# Altium PCB 0PCBSM.PcbDoc
Units mil, origin at the board's own origin, x right, y up, seen from the top; angles counter-clockwise.
Board outline 7580 x 7605 mil, 2 copper layers (Top Layer, Bottom Layer); 95 components, 85 nets, 326 pads, 4 vias.
Unrouted connection lines stored in the file: 25.
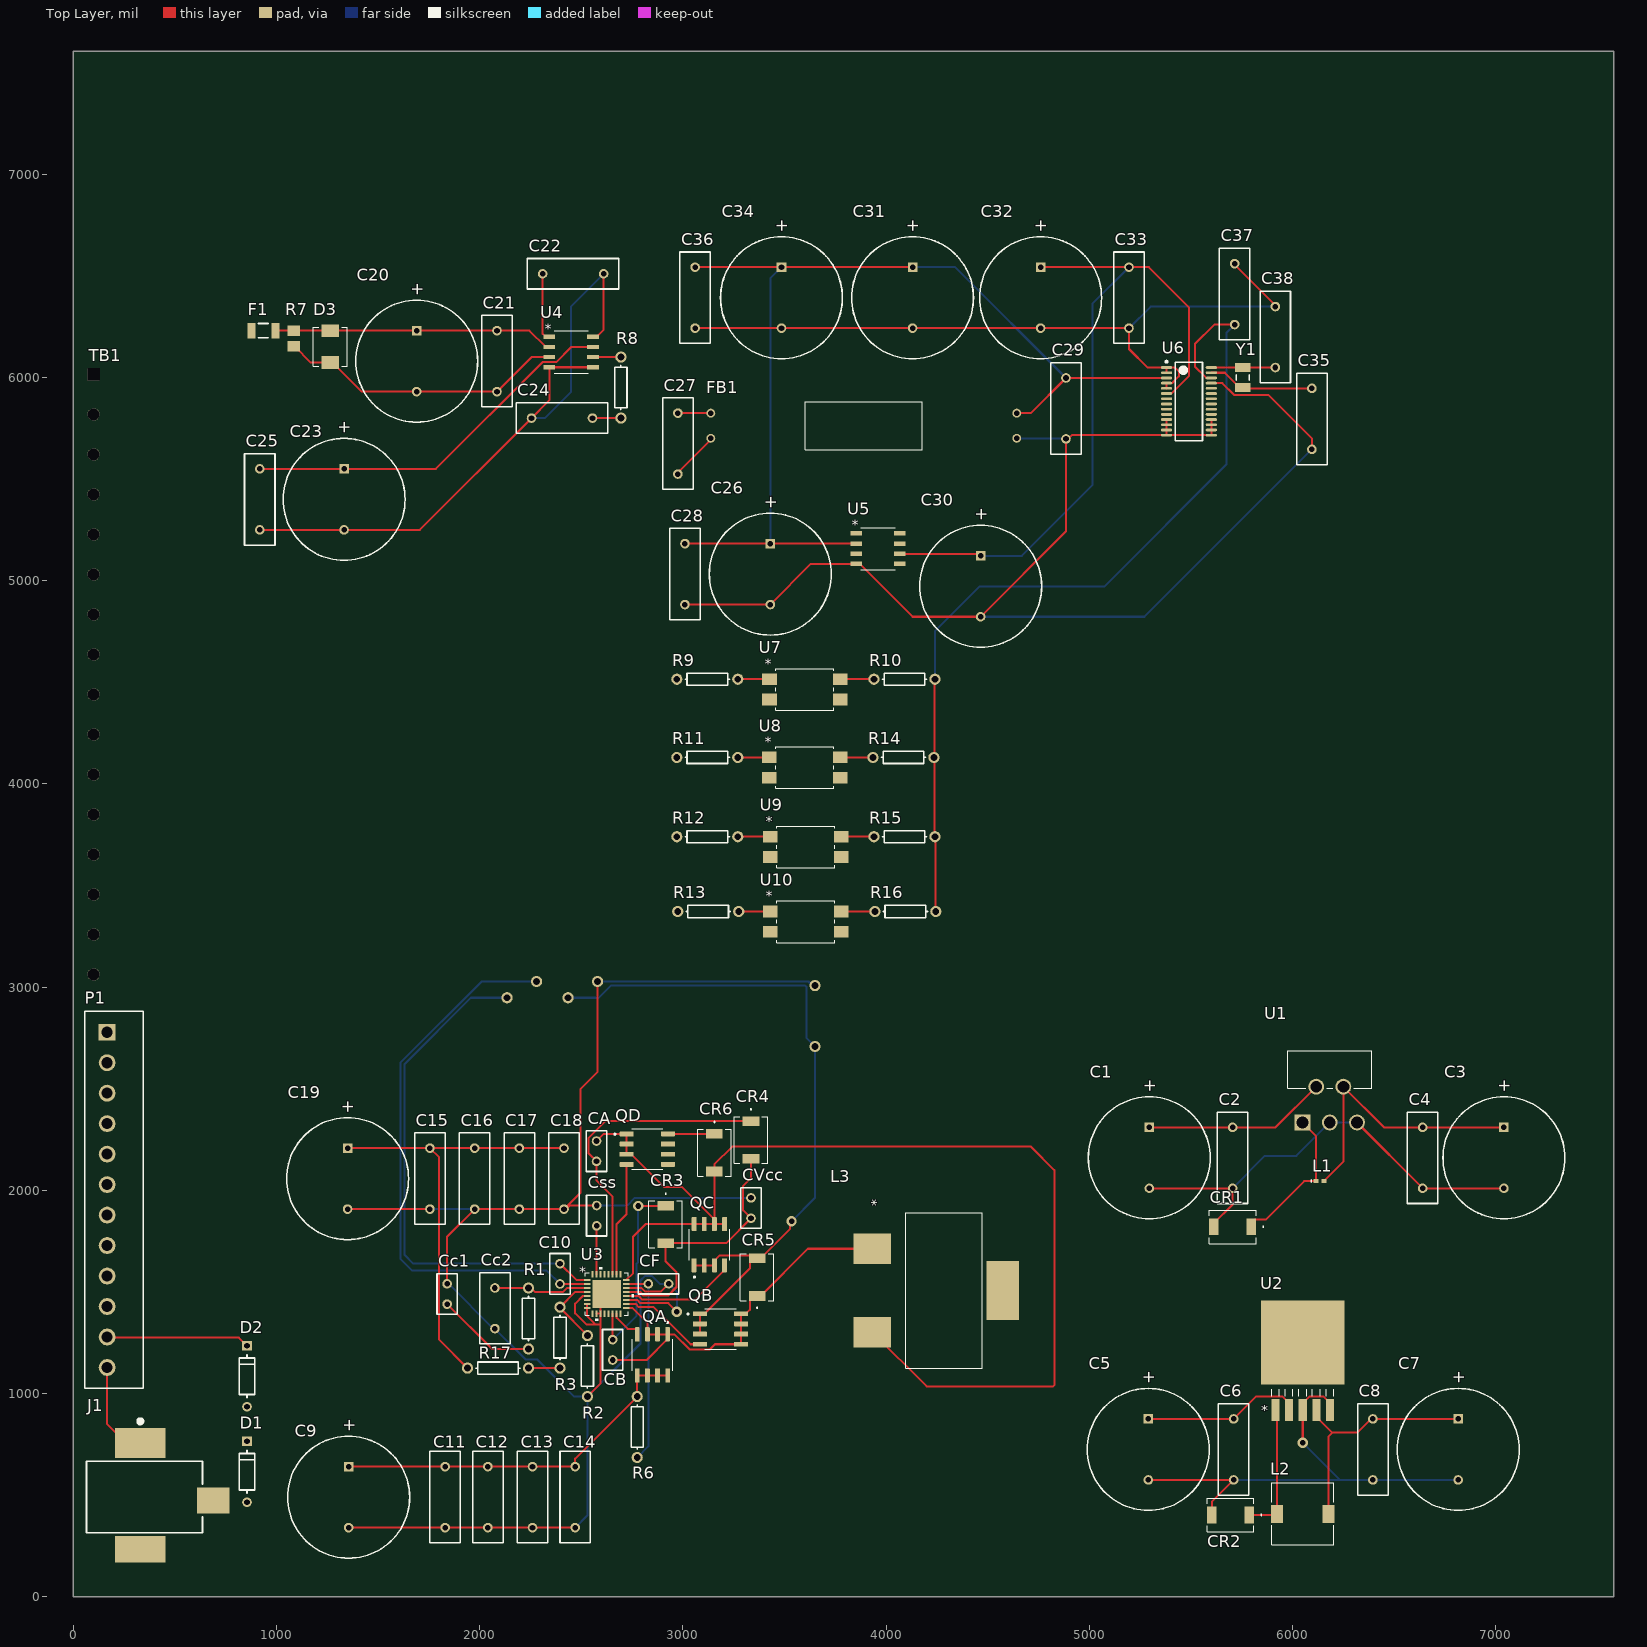
[diagram p0: Top Layer view]
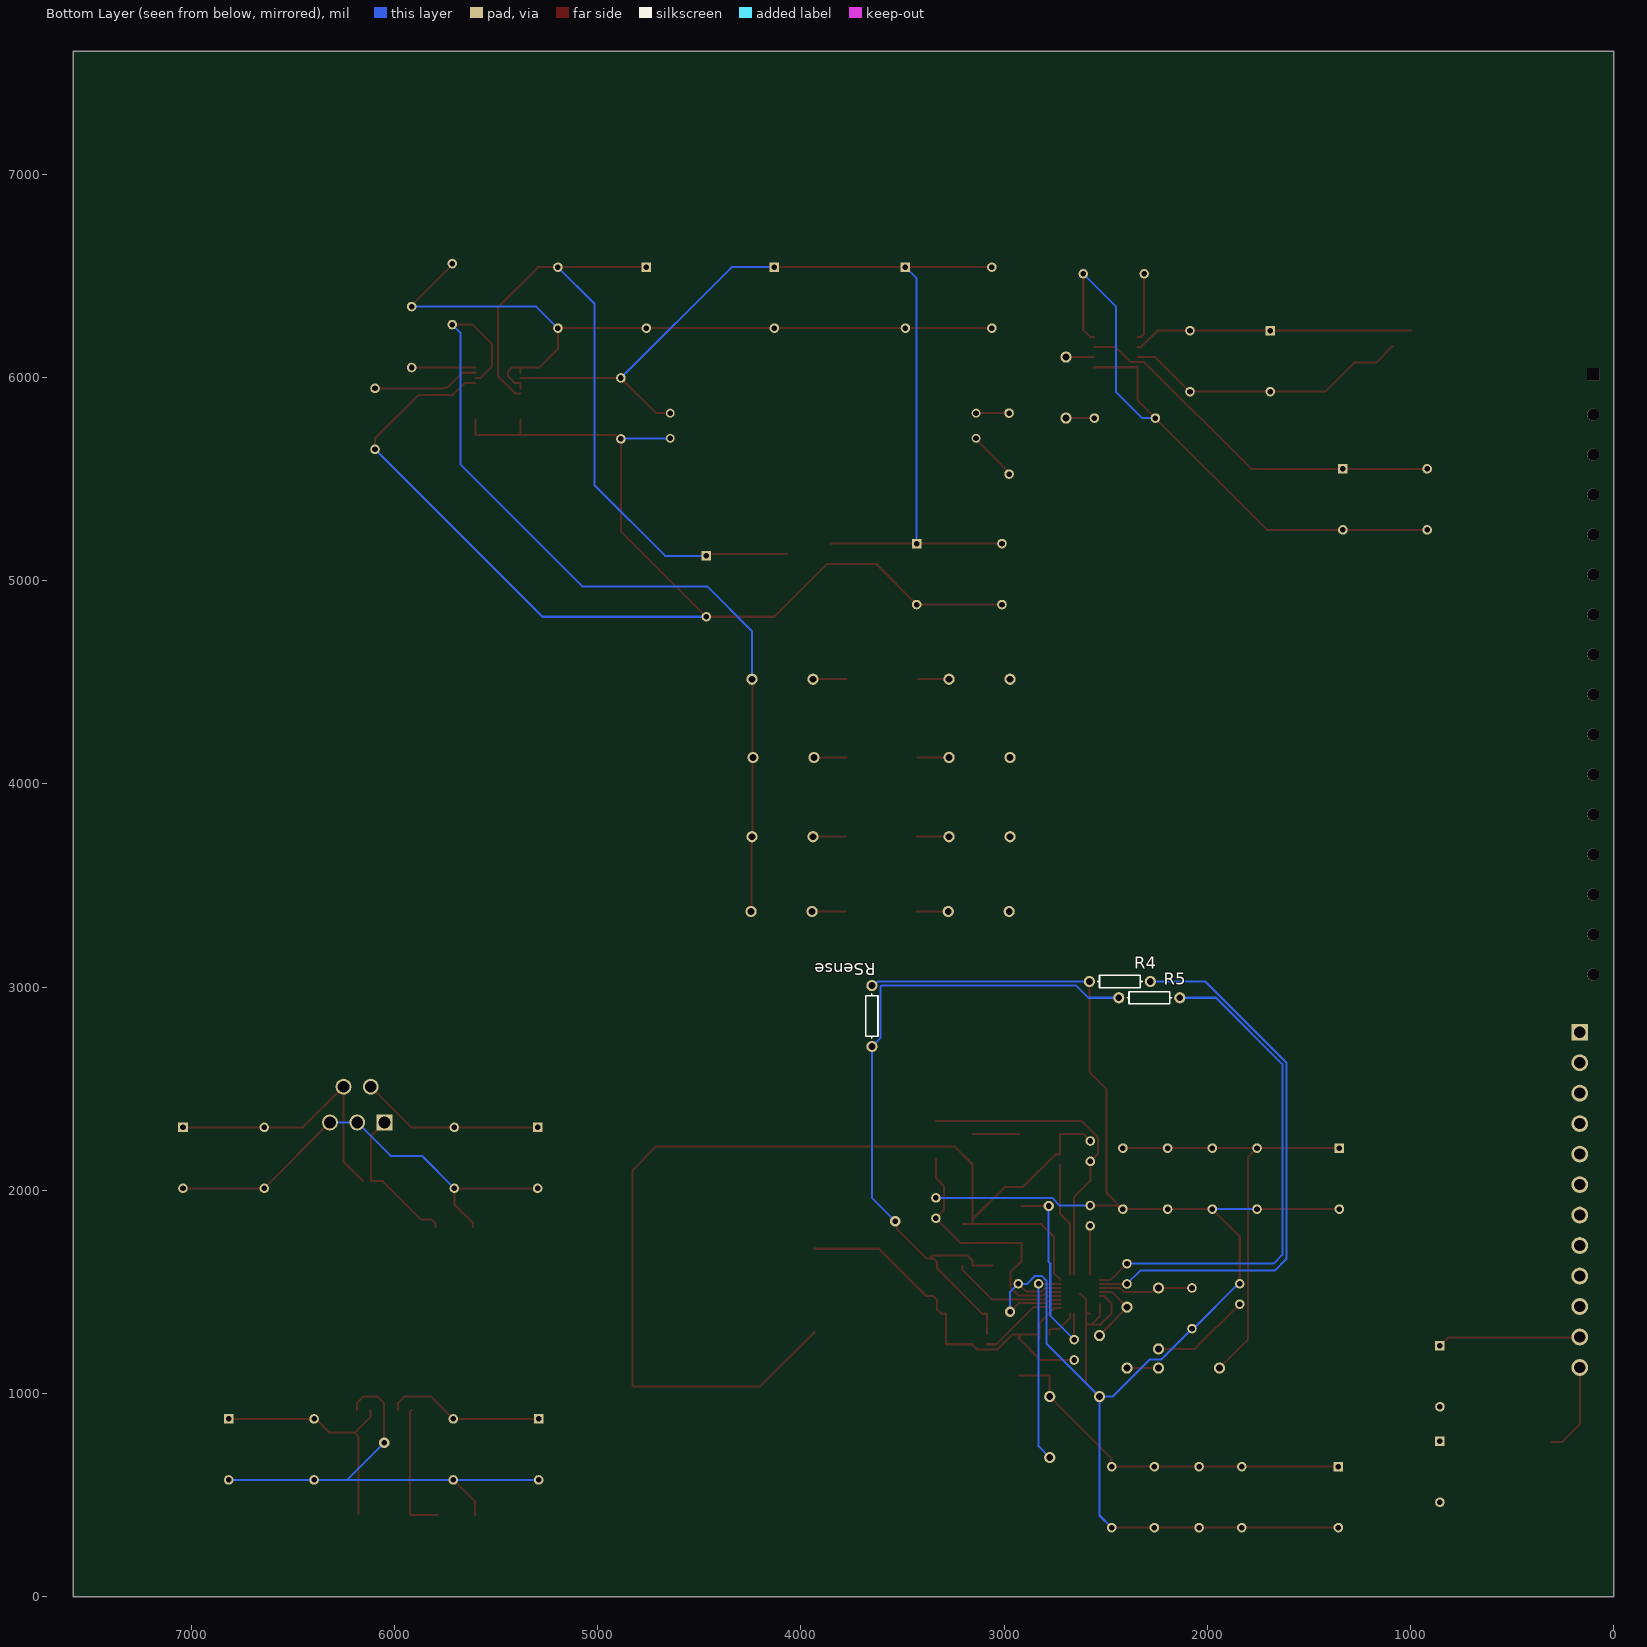
[diagram p1: Bottom Layer view, seen from below]

## Layer stack, top to bottom
Top Solder: solder mask 0.4, Solder Resist, Dk 3.5
Top Layer: signal copper 1.4
Dielectric 1: dielectric 12.6, FR-4, Dk 4.8
Bottom Layer: signal copper 1.4
Bottom Solder: solder mask 0.4, Solder Resist, Dk 3.5

## Board outline
0,0 7580,0 7580,7605 0,7605

## Design rules (kind name [scope] priority, off if disabled: settings)
Clearance [All] p1: gap=9 ignorepadtopadclearanceinfootprint=FALSE except(0: Arc-Hole Track-Hole SMDPad-Hole THPad-Hole Via-Hole Fill-Hole Poly-Hole Region-Hole Text-Hole; 10: Arc-Text Track-Text SMDPad-Text THPad-Text Via-Text Fill-Text Poly-Text Region-Text Text-Text)
Height [All] p1 off: minheight=0 maxheight=1000 prefheight=500
PolygonConnect [All] p1: connectstyle=Relief reliefconductorwidth=10 reliefentries=4 polygonreliefangle="90 Angle" airgapwidth=10
RoomDefinition "Input Subsystem" [InComponentClass('Input Subsystem')] p1: confinementstyle=ConfineIn formatcopy=TRUE lockcomponents=FALSE outline 2880,3185 6355,3185 6355,7196.74 2880,7196.74
RoomDefinition "Industrial Instrumentation Controller" [InComponentClass('Industrial Instrumentation Controller')] p2: confinementstyle=ConfineIn formatcopy=TRUE lockcomponents=FALSE outline 45,119.25 790,119.25 790,6158.15 45,6158.15
RoomDefinition 24VBuckBoostConverterSM [InComponentClass('24VBuckBoostConverterSM')] p3: confinementstyle=ConfineIn formatcopy=TRUE lockcomponents=FALSE outline 1040,170 4905,170 4905,3175 1040,3175
RoomDefinition "Power Subsystem" [InComponentClass('Power Subsystem')] p4: confinementstyle=ConfineIn formatcopy=TRUE lockcomponents=FALSE outline 945,420.12 945,1400.12 800,1400.12 800,420.12
RoomDefinition CurrentSensingSM [InComponentClass('CurrentSensingSM')] p5: confinementstyle=ConfineIn formatcopy=TRUE lockcomponents=FALSE outline 822.75,5050 2815,5050 2815,6710 822.75,6710
RoomDefinition 5VBuckConverterSM [InComponentClass('5VBuckConverterSM')] p6: confinementstyle=ConfineIn formatcopy=TRUE lockcomponents=FALSE outline 4975,1665 7385,1665 7385,2940 4975,2940
RoomDefinition 3.3VBuckConverterSM [InComponentClass('3.3VBuckConverterSM')] p7: confinementstyle=ConfineIn formatcopy=TRUE lockcomponents=FALSE outline 4980,187.5 7170,187.5 7170,1595 4980,1595
RoutingVias [All] p1: holewidth=28 width=50 viastyle="Through Hole" minholewidth=28 minwidth=50 maxholewidth=28 maxwidth=50
SolderMaskExpansion [All] p1: expansion=4 istentingtop=FALSE
Width [All] p1: maxlimit=10 minlimit=10 preferedwidth=10
29 further rules are at their usual default settings.

## Classes and differential pairs
component class "Power Subsystem": D1 D2
component class "Input Subsystem": C26 C27 C28 C29 C30 C31 C32 C33 C34 C35 C36 C37 C38 FB1 R9 R10 R11 R12 R13 R14 R15 R16 U5 U6 U7 U8 U9 U10 Y1
component class "Industrial Instrumentation Controller": J1 P1 TB1
component class CurrentSensingSM: C20 C21 C22 C23 C24 C25 D3 F1 R7 R8 U4
component class 24VBuckBoostConverterSM: C9 C10 C11 C12 C13 C14 C15 C16 C17 C18 C19 CA CB Cc1 Cc2 CF CR3 CR4 CR5 CR6 Css CVcc L3 QA QB QC QD R1 R2 R3 R4 R5 R6 R17 RSense U3
component class 5VBuckConverterSM: C1 C2 C3 C4 CR1 L1 U1
component class 3.3VBuckConverterSM: C5 C6 C7 C8 CR2 L2 U2

## Components (designator, comment, footprint, x,y, rotation, side; value= is the part's Value field where it differs from the comment)
C1 "Cap Pol1" RB7.6-15 5295,2160 r90 top value=47uF
C2 "Cap" RAD-0.3 5705,2160 r90 top value=0.1uF
C3 "Cap Pol1" RB7.6-15 7040,2160 r90 top value=47uF
C4 "Cap" RAD-0.3 6640,2160 r90 top value=0.1uF
C5 "Cap Pol1" RB7.6-15 5290,725 r90 top value=47uF
C6 "Cap" RAD-0.3 5710,725 r90 top value=0.1uF
C7 "Cap Pol1" RB7.6-15 6815,725 r90 top value=47uF
C8 "Cap" RAD-0.3 6395,725 r90 top value=0.1uF
C9 "Cap Pol1" RB7.6-15 1355,490 r90 top value=100uF
C10 "Cap" RAD-0.1 2395,1589.21 r270 top value=68pF
C11 "Cap" RAD-0.3 1830,490 r90 top value=4.7uF
C12 "Cap" RAD-0.3 2040,490 r90 top value=4.7uF
C13 "Cap" RAD-0.3 2260,490 r90 top value=1uF
C14 "Cap" RAD-0.3 2470,490 r90 top value=10uF
C15 "Cap" RAD-0.3 1755,2057.5 r90 top value=22uF
C16 "Cap" RAD-0.3 1975,2057.5 r90 top value=22uF
C17 "Cap" RAD-0.3 2195,2057.5 r90 top value=22uF
C18 "Cap" RAD-0.3 2415,2057.5 r90 top value=0.1uF
C19 "Cap Pol1" RB7.6-15 1350,2057.5 r90 top value=330uF
C20 "Cap Pol1" RB7.6-15 1690,6080 r90 top value=4.7uF
C21 "Cap" RAD-0.3 2085,6080 r90 top value=0.1uF
C22 "Cap" RAD-0.3 2460,6510 r180 top value=1uF
C23 "Cap Pol1" RB7.6-15 1332.75,5400 r90 top value=47uF
C24 "Cap" RAD-0.3 2405,5800 r0 top value=1uF
C25 "Cap" RAD-0.3 917.75,5400 r90 top value=0.1uF
C26 "Cap Pol1" RB7.6-15 3430,5032.24 r90 top value=47uF
C27 "Cap" RAD-0.3 2975,5674.25 r90 top value=0.1uF
C28 "Cap" RAD-0.3 3010,5032.24 r90 top value=0.1uF
C29 "Cap" RAD-0.3 4885,5847.24 r90 top value=0.1uF
C30 "Cap Pol1" RB7.6-15 4465,4972.24 r90 top value=47uF
C31 "Cap Pol1" RB7.6-15 4130,6392.24 r90 top value=20uF
C32 "Cap Pol1" RB7.6-15 4760,6392.24 r90 top value=47uF
C33 "Cap" RAD-0.3 5195,6392.24 r90 top value=0.1uF
C34 "Cap Pol1" RB7.6-15 3485,6392.24 r90 top value=10uF
C35 "Cap" RAD-0.3 6095,5796.22 r90 top value=10pF
C36 "Cap" RAD-0.3 3060,6392.24 r90 top value=0.1uF
C37 "Cap" RAD-0.3 5715,6410 r270 top value=0.1uF
C38 "Cap" RAD-0.3 5915,6198.58 r270 top value=10pF
CA "Cap" RAD-0.1 2575,2192.5 r270 top value=220nF
CB "Cap" RAD-0.1 2654.53,1215 r270 top value=220nF
Cc1 "Cap" RAD-0.1 1840,1490 r270 top value=10nF
Cc2 "Cap" RAD-0.2 2075,1419.53 r90 top value=47pF
CF "Cap" RAD-0.1 2880,1540 r180 top value=0.1uF
CR1 "B340B-13-F" B340A-13-F 5705,1820 r180 top
CR2 "B340B-13-F" B340A-13-F 5695,402.5 r180 top
CR3 "B340B-13-F" B340A-13-F 2915,1832.5 r270 top
CR4 "B340B-13-F" B340A-13-F 3335,2247.5 r270 top
CR5 "B340B-13-F" B340A-13-F 3365,1572.5 r90 top
CR6 "B340B-13-F" B340A-13-F 3155,2185 r270 top
Css "Cap" RAD-0.1 2575.79,1875 r270 top value=220nF
CVcc "Cap" RAD-0.1 3335,1912.5 r270 top value=4.7uF
D1 "1N4148" FP-017AG-MFG 855,615.12 r270 top
D2 "1N4148" FP-017AG-MFG 855,1085.12 r270 top
D3 "Tranzorb" SZ1SMB36CAT3G 1265,6151.5 r90 top
F1 "0ZCJ0005FF2E" FP-0ZCJ0005FF2E-MFG 935,6230 r0 top
FB1 "FB20011-3B-RC" FB20011 3890,5762.24 r0 top
J1 "RASM722X" SWIT-RASM722X_V 510,495 r270 top
L1 "Inductor" 0402-A 6134.68,2045 r0 top value=100uH
L2 "Inductor" B82472P6683M000 6050,407.5 r0 top value=68uH
L3 "SER2013-472MLB" SER2013-472MLB 4285,1507.5 r270 top value=4.7uH
P1 "691701310012B" 691701310012B 200,1953.15 r270 top
QA "TSM120N06LCS_RLG" SOP127P600X200-8N 2850,1190 r270 top
QB "TSM120N06LCS_RLG" SOP127P600X200-8N 3185,1317.5 r0 top
QC "TSM120N06LCS_RLG" SOP127P600X200-8N 3130,1732.5 r90 top
QD "TSM120N06LCS_RLG" SOP127P600X200-8N 2825,2202.5 r0 top
R1 "Res1" AXIAL-0.3 2240,1369.53 r90 top value=100k
R2 "Res1" AXIAL-0.3 2530,1135 r270 top value=1k
R3 "Res1" AXIAL-0.3 2395,1275 r270 top value=28k
R4 "Res1" AXIAL-0.3 2430,3027.5 r180 bottom value=100
R5 "Res1" AXIAL-0.3 2285,2947.5 r180 bottom value=100
R6 "Res1" AXIAL-0.3 2775,835 r270 top value=10
R7 "RG2012N-101-W-T1" RESC2013X50X40ML20T20 1085,6191.61 r90 top value=100
R8 "Res1" AXIAL-0.3 2695,5950 r270 top value=1K
R9 "Res1" AXIAL-0.3 3120,4515 r180 top value=4.7k
R10 "Res1" AXIAL-0.3 4090,4515 r0 top value=4.7k
R11 "Res1" AXIAL-0.3 3120,4130 r180 top value=4.7k
R12 "Res1" AXIAL-0.3 3120,3740 r180 top value=4.7k
R13 "Res1" AXIAL-0.3 3124.5,3371.74 r180 top value=4.7k
R14 "Res1" AXIAL-0.3 4085,4130 r0 top value=4.7k
R15 "Res1" AXIAL-0.3 4090,3740 r0 top value=4.7k
R16 "Res1" AXIAL-0.3 4094.5,3371.74 r0 top value=4.7k
R17 "Res1" AXIAL-0.3 2090,1125 r180 top value=1k
RSense "Res1" AXIAL-0.3 3650,2857.5 r90 bottom value=18m
TB1 "OSTOQ167151" OSTOQ167151 100,6014.8 r0 top
U1 "LM2595T-5.0/NOPB" LM2595ST-5P0 6317,2853 r0 top
U2 "LM2595SX-3.3/NOPB" LM2595SX-3P3 6050,1245 r0 top
U3 "LTC3780EUH#TRPBF" LTC3780EUH 2625,1490 r0 top
U4 "LT1990ACS8#PBF" LT1990ACS8-PBF 2450,6125 r0 top
U5 "ISL21090BFB825Z-TK" ISL21090BFB825Z-TK 3960,5157.24 r0 top
U6 "AD7718BRUZ" AD7718BRUZ 5490,5882.24 r0 top
U7 "PS2501L-1-A" PS2501L-1-A 3600,4465 r0 top
U8 "PS2501L-1-A" PS2501L-1-A 3599.5,4080 r0 top
U9 "PS2501L-1-A" PS2501L-1-A 3604.5,3690 r0 top
U10 "PS2501L-1-A" PS2501L-1-A 3604.5,3321.74 r0 top
Y1 "ABS07-32.768KHZ-T" FP-ABS07-MFG 5755,5999.37 r270 top

## Footprints (in the part's own frame and the unit in brackets; to place one, negate y for a bottom-side part, rotate by r counter-clockwise, add the part's x,y. Pads: shape width x height; smd on the part's side, far side on the other; paste and mask are expansions set on the pad)
0402-A [mm] "Chip Inductor, Body 1.0x0.5mm, IPC High Density"
  rect 0.6x0.5 smd: 1(-0.5,0) 2(0.5,0)
  silkscreen extent -1.1,-0.15 -1.1,0.15, body extent -0.55,-0.3 0.55,0.3, height 0.55
691701310012B [mm] "Vertical PCB Header THR Type, pitch 3.81mm, 12p"
  rect 2.1x2.1 hole 1.4: 1(-20.955,-0.85)
  round 2.1 hole 1.4: 2(-17.145,-0.85) 3(-13.335,-0.85) 4(-9.525,-0.85) 5(-5.715,-0.85) 6(-1.905,-0.85) 7(1.905,-0.85) 8(5.715,-0.85) 9(9.525,-0.85) 10(13.335,-0.85) 11(17.145,-0.85) 12(20.955,-0.85)
  silkscreen extent -23.55,-3.65 23.55,3.65, body extent -23.55,-3.65 23.55,3.65, height 9.25
AD7718BRUZ [mm] "TSOP, 28-Leads, Body 9.7x4.4mm, Pitch 0.65mm, IPC High Density"
  oval 1.4x0.35 smd: 1(-2.8,4.225) 2(-2.8,3.575) 3(-2.8,2.925) 4(-2.8,2.275) 5(-2.8,1.625) 6(-2.8,0.975) 7(-2.8,0.325) 8(-2.8,-0.325) 9(-2.8,-0.975) 10(-2.8,-1.625) 11(-2.8,-2.275) 12(-2.8,-2.925) 13(-2.8,-3.575) 14(-2.8,-4.225) 15(2.8,-4.225) 16(2.8,-3.575) 17(2.8,-2.925) 18(2.8,-2.275) 19(2.8,-1.625) 20(2.8,-0.975) 21(2.8,-0.325) 22(2.8,0.325) 23(2.8,0.975) 24(2.8,1.625) 25(2.8,2.275) 26(2.8,2.925) 27(2.8,3.575) 28(2.8,4.225)
  silkscreen extent -2.92,-4.9 1.7,5.07, body extent -2.25,-4.9 2.25,4.9, height 1.2
AXIAL-0.3 [mm] "Axial Device, Thru-Hole; 2 Leads; 0.3 in Pin Spacing"
  round 1.4 hole 0.85: 1(-3.81,0) 2(3.81,0)
  silkscreen extent -2.77,-0.76 2.77,0.76
B340A-13-F [mil]
  rect 47x82 smd paste+0 mask+0: 1(-92.5,0) 2(92.5,0)
  silkscreen extent -154,-83 115,83, body extent 0,0 10,10, height 10
B82472P6683M000 [mil]
  rect 59x87 smd paste+0 mask+0: 1(-126,0) 2(126,0)
  silkscreen extent -152,-152 152,152, body extent -147,-148 147,148, height 177
FB20011 [mm]
  round 1.11 hole 0.71: 1(-19.115,1.575) 2(-19.115,-1.575) 3(19.115,-1.575) 4(19.115,1.575)
  silkscreen extent -7.3,-3 7.3,3
FP-0ZCJ0005FF2E-MFG [mm]
  rect 1x1.9 smd paste+0 mask+0: 1(-1.5,0) 2(1.5,0)
  silkscreen extent -0.62,-0.9 0.62,0.9, body extent -2.1,-1.05 2.1,1.05, height 0.25
FP-017AG-MFG [mm]
  rect 1.2x1.2 hole 0.7 paste-1000 mask+0: 1(-3.813,0)
  round 1.2 hole 0.7 paste-1000 mask+0: 2(3.813,0)
  silkscreen extent -2.68,-0.95 2.68,0.95, body extent -4.51,-1.05 4.51,1.05, height 0.25
FP-ABS07-MFG [mm]
  rect 1.1x1.9 smd paste+0 mask+0: 1(-1.25,0) 2(1.25,0)
  silkscreen extent -0.33,-0.8 0.33,0.8, body extent -1.9,-1.05 1.9,1.05, height 0.25
ISL21090BFB825Z-TK [mil]
  rect 57x22 smd paste+0 mask+0: 1(-107.5,75) 2(-107.5,25) 3(-107.5,-25) 4(-107.5,-75) 5(107.5,-75) 6(107.5,-25) 7(107.5,25) 8(107.5,75)
  silkscreen extent -84,-104 84,104, body extent -122,-99 122,99, height 68
LM2595ST-5P0 [mil]
  rect 78x78 hole 58: 1(-268,-519)
  round 78 hole 58: 2(-201,-343) 3(-134,-519) 4(-67,-343) 5(0,-519)
  silkscreen extent -342,-352 74,-167, body extent -342,-546 72,-170, height 1074
LM2595SX-3P3 [mil]
  rect 40x106 smd: 1(-134,-326) 2(-67,-326) 3(0,-326) 4(67,-326) 5(134,-326)
  rect 410x412 smd: 6(0,6)
  silkscreen extent -153,-259 153,-224, body extent -205,-323 205,155, height 189
LT1990ACS8-PBF [mil]
  rect 57.5x21 smd paste+0 mask+0: 1(-107.25,75) 2(-107.25,25) 3(-107.25,-25) 4(-107.25,-75) 5(107.25,-75) 6(107.25,-25) 7(107.25,25) 8(107.25,75)
  silkscreen extent -84,-104 84,104, body extent -122,-99 122,99, height 69
LTC3780EUH [mm]
  rect 0.805x0.249 smd paste+0 mask+0: 1(-2.452,1.75) 2(-2.452,1.25) 3(-2.452,0.75) 4(-2.452,0.25) 5(-2.452,-0.25) 6(-2.452,-0.75) 7(-2.452,-1.25) 8(-2.452,-1.75) 17(2.452,-1.75) 18(2.452,-1.25) 19(2.452,-0.75) 20(2.452,-0.25) 21(2.452,0.25) 22(2.452,0.75) 23(2.452,1.25) 24(2.452,1.75)
  rect 0.249x0.805 smd paste+0 mask+0: 9(-1.75,-2.452) 10(-1.25,-2.452) 11(-0.75,-2.452) 12(-0.25,-2.452) 13(0.25,-2.452) 14(0.75,-2.452) 15(1.25,-2.452) 16(1.75,-2.452) 25(1.75,2.452) 26(1.25,2.452) 27(0.75,2.452) 28(0.25,2.452) 29(-0.25,2.452) 30(-0.75,2.452) 31(-1.25,2.452) 32(-1.75,2.452)
  rect 3.55x3.55 smd paste-1.762 mask+0: 33(0,0)
  silkscreen extent -2.68,-3.36 3.36,3.36, body extent -2.55,-2.55 2.55,2.55, height 0.8
OSTOQ167151 [mil]
  rect 60x60 hole 59.06 square: 1(0,0)
  round 60 hole 59.06: 2(0,-196.85) 3(0,-393.7) 4(0,-590.55) 5(0,-787.4) 6(0,-984.25) 7(0,-1181.1) 8(0,-1377.95) 9(0,-1574.8) 10(0,-1771.65) 11(0,-1968.5) 12(0,-2165.36) 13(0,-2362.21) 14(0,-2559.06) 15(0,-2755.91) 16(0,-2952.76)
PS2501L-1-A [mil]
  rect 73x57 smd paste+0 mask+0: 1(-174.5,50) 2(-174.5,-50) 3(174.5,-50) 4(174.5,50)
  silkscreen extent -143,-102 143,102, body extent -197,-97 197,97, height 150
RAD-0.1 [mm] "Radial Cap, Thru-Hole; 2 Leads; 0.1 in Pin Spacing"
  round 1.2 hole 0.7: 1(-1.27,0) 2(1.27,0)
  silkscreen extent -2.54,-1.27 2.54,1.27
RAD-0.2 [mm] "Radial Cap, Thru-Hole; 2 Leads; 0.2 in Pin Spacing"
  round 1.2 hole 0.7: 1(-2.54,0) 2(2.54,0)
  silkscreen extent -4.44,-1.91 4.44,1.91
RAD-0.3 [mm] "Radial Cap, Thru-Hole; 2 Leads; 0.3 in Pin Spacing"
  round 1.2 hole 0.7: 1(-3.81,0) 2(3.81,0)
  silkscreen extent -5.71,-1.91 5.71,1.91
RB7.6-15 [mm] "Polarized Capacitor (Radial); 2 Leads"
  rect 1.2x1.2 hole 0.7: 1(3.81,0)
  round 1.2 hole 0.7: 2(-3.81,0)
  silkscreen extent -7.62,-7.62 7.62,7.62
RESC2013X50X40ML20T20 [mm] "Chip Resistor, 2-Leads, Body 2.00x1.25mm, IPC Low Density"
  rect 1.35x1.55 smd: 1(-0.975,0) 2(0.975,0)
  body extent -1.1,-0.72 1.1,0.72, height 0.5
SER2013-472MLB [mil]
  rect 150x185 smd paste+0 mask+0: 1(-205,-352.5) 2(205,-352.5)
  rect 290x160 smd paste+0 mask+0: 3(0,290)
  silkscreen extent -383,-188 383,188, body extent 0,0 10,10, height 10
SOP127P600X200-8N [mm]
  rrect25% 1.76x0.6 smd: 1(-2.58,1.905) 2(-2.58,0.635) 3(-2.58,-0.635) 4(-2.58,-1.905) 5(2.58,-1.905) 6(2.58,-0.635) 7(2.58,0.635) 8(2.58,1.905)
  silkscreen extent -4.16,-2.53 1.95,2.53, body extent -3,-2.42 3,2.42, height 2.1
SWIT-RASM722X_V [mm] "SMD, 3-Leads, Body 14.5x9mm"
  rect 3.81x6.35 smd: 1(-6.645,-4.57)
  rect 3.3x4.06 smd: 2(0.545,4.57)
  rect 3.3x6.35 smd: 3(6.645,-4.57)
  silkscreen extent -9.6,-11.3 4.6,3.2, body extent -7.5,-11.23 7.5,5.84, height 11.1
SZ1SMB36CAT3G [mil]
  rect 63x87 smd paste+0 mask+0: 1(-78.5,0) 2(78.5,0)
  silkscreen extent -96,-83 96,83, body extent -110,-78 110,78, height 95

## Part data
C1 C3 C5 C7 C9 C19: "Polarized Capacitor (Radial)", Voltage Rating=35V, LatestRevisionDate=17-Jul-2002, LatestRevisionNote="Re-released for DXP Platform.", PackageDescription="Polarized Capacitor (Radial); 2 Leads", PackageReference=RB7.6-15, Published=8-Jun-2000, Publisher="Altium Limited"
C2 C4 C6 C8 C21 C25 C27 C28 C29 C33 C35 C36 C37 C38: "Capacitor", Voltage Rating=50V, LatestRevisionDate=17-Jul-2002, LatestRevisionNote="Re-released for DXP Platform.", PackageDescription="Radial Cap, Thru-Hole; 2 Leads; 0.3 in Pin Spacing", PackageReference=RAD-0.3, Published=8-Jun-2000, Publisher="Altium Limited"
C10 CA CB Cc1 Cc2 CF Css CVcc: "Capacitor", LatestRevisionDate=17-Jul-2002, LatestRevisionNote="Re-released for DXP Platform.", PackageDescription="Radial Cap, Thru-Hole; 2 Leads; 0.3 in Pin Spacing", PackageReference=RAD-0.3, Published=8-Jun-2000, Publisher="Altium Limited"
C11 C12 C13 C14 C15 C16 C17 C18: "Capacitor", Voltage Rating=35V, LatestRevisionDate=17-Jul-2002, LatestRevisionNote="Re-released for DXP Platform.", PackageDescription="Radial Cap, Thru-Hole; 2 Leads; 0.3 in Pin Spacing", PackageReference=RAD-0.3, Published=8-Jun-2000, Publisher="Altium Limited"
C20: "Polarized Capacitor (Radial)", Voltage Rating=25V, LatestRevisionDate=17-Jul-2002, LatestRevisionNote="Re-released for DXP Platform.", PackageDescription="Polarized Capacitor (Radial); 2 Leads", PackageReference=RB7.6-15, Published=8-Jun-2000, Publisher="Altium Limited"
C22 C24: "Capacitor", Voltage Rating=10V, LatestRevisionDate=17-Jul-2002, LatestRevisionNote="Re-released for DXP Platform.", PackageDescription="Radial Cap, Thru-Hole; 2 Leads; 0.3 in Pin Spacing", PackageReference=RAD-0.3, Published=8-Jun-2000, Publisher="Altium Limited"
C23 C26 C30 C31 C32: "Polarized Capacitor (Radial)", Voltage Rating=6.3V, LatestRevisionDate=17-Jul-2002, LatestRevisionNote="Re-released for DXP Platform.", PackageDescription="Polarized Capacitor (Radial); 2 Leads", PackageReference=RB7.6-15, Published=8-Jun-2000, Publisher="Altium Limited"
C34: "Polarized Capacitor (Radial)", Voltage Rating=50V, LatestRevisionDate=17-Jul-2002, LatestRevisionNote="Re-released for DXP Platform.", PackageDescription="Polarized Capacitor (Radial); 2 Leads", PackageReference=RB7.6-15, Published=8-Jun-2000, Publisher="Altium Limited"
CR1 CR2 CR3 CR4 CR5 CR6: "No Description Available", Mfr_Name="Diodes Inc", Copyright="Copyright (C) 2022 Ultra Librarian. All rights reserved.", Digi-Key_Part_Number_1=B340B-FDITR-ND, Digi-Key_Part_Number_2=B340B-FDIDKR-ND, Digi-Key_Part_Number_3=B340B-FDICT-ND, Manufacturer_Part_Number=B340B-13-F, RefDes=RefDes, Type=DEV
D1 D2: library part CMP-07163-000046-1, "DIODE GEN PURP 100V 200MA DO35", Average Rectified Current=200mA, Capacitance=4pF, Case/Package=DO-35, Current=4A, Forward Current=300mA, Forward Voltage=1V, Max Forward Surge Current (Ifsm)=1A, Max Operating Temperature=175°C, Max Power Dissipation=500mW, Max Repetitive Reverse Voltage (Vrrm)=100V, Max Reverse Current=5uA, Min Operating Temperature=-65°C, Package Quantity=2000, Contact Plating=Tin, Current Rating=200mA, Diameter=1.91mm, Element Configuration=Single, Height=4.56mm, Lead Free="Lead Free", Length=4.56mm, Max Reverse Voltage (DC)=100V, Max Surge Current=4A, Mount="Through Hole", Number of Pins=2, Output Current=200mA, Outside Diameter=1.85mm, Packaging=Bulk, Peak Non-Repetitive Surge Current=4A, Polarity=Standard, Power Dissipation=500mW, Radiation Hardening=No, REACH SVHC="No SVHC", Recovery Time=4ns, Reverse Recovery Time=4ns, Reverse Voltage=100V, Series=-, Voltage=100V, Voltage Rating (DC)=100V, Weight=0.01lb, Width=1.91mm
D3: "1SMB Series 600 W 36 V Bi-Directional Surface Mount TVS Diode - DO-214AA", Breakdown Voltage=40V, Case/Package=SMB, Clamping Voltage=58.1V, Leakage Current=5uA, Manufacturer="ON Semiconductor", Manufacturer Part Number=SZ1SMB36CAT3G, Max Operating Temperature=150°C, Max Power Dissipation=600W, Min Operating Temperature=-65°C, Package Quantity=2500, Peak Pulse Current=10.3A, Power Line Protection=No, Resistor Type=Zener, Reverse Standoff Voltage=36V, Supplier Part Number 1=76T7971, Test Current=1mA, Category="TVS Diodes", ComponentLink1Description=https://datasheet.ciiva.com/11313/1smb10cat3-d-11313549.pdf?src-supplier=Avnet, ComponentLink1URL=https://datasheet.ciiva.com/11313/1smb10cat3-d-11313549.pdf?src-supplier=Avnet, ComponentLink2Description=https://datasheet.ciiva.com/354/1smb10cat3-d-354502.pdf?src-supplier=Digi-Key, ComponentLink2URL=https://datasheet.ciiva.com/354/1smb10cat3-d-354502.pdf?src-supplier=Digi-Key, Diode Type=ZENER, Direction=Bidirectional, Element Configuration=Single, ESD Protection=Yes, Height=2.41mm, LatestRevisionDate=17-Jul-2002, LatestRevisionNote="Re-released for DXP Platform.", Lead Free="Lead Free", Length=4.57mm, Max Reverse Leakage Current=5uA, Min Breakdown Voltage=40V, Mount="Surface Mount", Number of Bidirectional Channels=1, Number of Elements=1, Number of Pins=2, PackageDescription="Axial Lead Diode", PackageReference=DO-7, Packaging="Tape and Reel", Peak Pulse Power=600W, Polarity=Bidirectional, Published=24-Mar-1999, Publisher="Altium Limited", Reverse Breakdown Voltage=40V, RoHS=Yes, RoHS Compliant=Yes, Series="Automotive, AEC-Q101", Supplier 1=Newark, Width=3.81mm
F1: library part CMP-16043-000008-1, "PTC RESET FUSE 60V 50MA 1206", Case Code (Imperial)=1206, Case Code (Metric)=3216, Hold Current=50mA, Max Current Rating=10A, Max Operating Temperature=85°C, Max Voltage Rating (DC)=60V, Min Operating Temperature=-40°C, Package Quantity=1, Power Dissipation=400mW, Trip Current=150mA, Approvals=UL, Case/Package=1206, Contact Plating=Tin, Lead Free="Lead Free", Mount="Surface Mount", Number of Terminals/Pins=2, Packaging="Tape and Reel", RoHS Compliant=Yes, Time to Trip=1.5s
FB1: library part FB20011
J1: library part CMP-1772-00002-1, "Power Jack, 5 A, 250 V, 3-Pin SMD, RoHS, Bulk", ComponentLink1Description="Manufacturer URL", ComponentLink1URL=http://www.switchcraft.com/, ComponentLink2Description=Datasheet, ComponentLink2URL=http://www.switchcraft.com/Drawings/rasm732x_cd.pdf, DatasheetVersion="Rev. A, 09/2005", PackageDescription="3-Pin Surface Mount Device, Body 14.5 x 9 mm", PackageReference=RASM722X
L1: "Ind Power Shielded Wirewound 100uH 20% 100KHz 1.6A Carrier T/R", Case/Package=Nonstandard, Current Rating=1.6A, DC Resistance (DCR)=187mR, Inductance=100uH, Manufacturer=Sumida, Manufacturer Part Number=CDRH125/LDNP-101MC, Max Operating Temperature=100°C, Min Operating Temperature=-40°C, Package Quantity=1, Supplier Part Number 1=308-1544-1-ND, Test Frequency=100kHz, Tolerance=20%, Category="Fixed Inductors", Code_IEC=1005, Code_JEITA=0402, ComponentLink1Description=http://www.mouser.com/ds/2/390/CDRH125LD-523473.pdf?src-supplier=Mouser, ComponentLink1URL=http://www.mouser.com/ds/2/390/CDRH125LD-523473.pdf?src-supplier=Mouser, ComponentLink2Description=http://products.sumida.com/products/pdf/CDRH125,CDRH125LD.pdf?src-supplier=Digi-Key, ComponentLink2URL=http://products.sumida.com/products/pdf/CDRH125,CDRH125LD.pdf?src-supplier=Digi-Key, ComponentLink3Description=http://www.sumida.com/products/pdf/CDRH125,CDRH125LD.pdf?src-supplier=Avnet, ComponentLink3URL=http://www.sumida.com/products/pdf/CDRH125,CDRH125LD.pdf?src-supplier=Avnet, ComponentLink4Description=http://www.sumida.com/products/pdf/CDRH125,CDRH125LD.pdf?src-supplier=Future+Electronics, ComponentLink4URL=http://www.sumida.com/products/pdf/CDRH125,CDRH125LD.pdf?src-supplier=Future+Electronics, Core Material=Ferrite, Depth=12.3mm, Height=6mm, Height - Seated (Max)=0.236inch, LatestRevisionDate=29-May-2009, LatestRevisionNote="IPC-7351 Footprint Added.", Lead Free="Lead Free", Length=0.472inch, Max DC Current=1.6A, Mount="Surface Mount", PackageDescription="Chip Inductor", PackageReference=0402-A, Packaging="Tape and Reel", Pricing 1="1=1.46000, 10=1.35800, 25=1.25360, 50=1.04480, 100=0.98210, 250=0.87760 (USD)", Published=8-Jun-2000, Publisher="Altium Limited", Radiation Hardening=No, Rated Current-Max=1.6A, RoHS=Yes, RoHS Compliant=Yes, Series=CDRH125/LD, Shielding=Shielded, Stock 1=1012, Supplier 1=Digi-Key, Termination=SMD/SMT, Width=0.472inch
L2: "Ind Power Shielded Wirewound 68uH 20% 100KHz Ferrite 820mA Blister T/R", Case/Package=SMD/SMT, DC Current=820mA, DC Resistance (DCR)=260mR, Inductance=68uH, Manufacturer="TDK EPCOS", Manufacturer Part Number=B82472P6683M000, Max DC Current=680mA, Package Quantity=1000, Supplier Part Number 1=495-77101-1-ND, Test Frequency=100kHz, Tolerance=20%, Category="Fixed Inductors", Code_IEC=1005, Code_JEITA=0402, ComponentLink1Description=https://datasheet.ciiva.com/13285/b82472g6-525414-13285823.pdf?src-supplier=Mouser, ComponentLink1URL=https://datasheet.ciiva.com/13285/b82472g6-525414-13285823.pdf?src-supplier=Mouser, Core Material=Ferrite, Depth=7.5mm, LatestRevisionDate=29-May-2009, LatestRevisionNote="IPC-7351 Footprint Added.", Length=7.5mm, Military Standard=Not, PackageDescription="Chip Inductor", PackageReference=0402-A, Packaging="Tape and Reel", Pricing 1="1=1.69000, 10=1.56600, 25=1.44520, 50=1.20440, 100=1.13220, 250=1.01172, 500=0.86718 (USD)", Published=8-Jun-2000, Publisher="Altium Limited", RoHS=Yes, RoHS Compliant=Yes, Series=B82472P6, Shielding=Shielded, Stock 1=3192, Supplier 1=Digi-Key, Termination=SMD/SMT, Weight=0.052911oz
L3: "No Description Available", Mfr_Name=Coilcraft, Copyright="Copyright (C) 2022 Ultra Librarian. All rights reserved.", Manufacturer_Part_Number=SER2013-472MLB, RefDes=RefDes, Type=DEV
P1: library part CMP-1502-01991-1, "Serie 7013 B - 3.81mm Vertical PCB Header THR Type WR-TBL, 12 pin", Manufacturer="Wurth Elektronik", Operating Temperature=-40to105degC, Datasheet URL=http://katalog.we-online.de/em/datasheet/6917013100xxB.pdf, Gender=Male, Manufacturer URL=http://www.we-online.de, Mounting Technology=SMT, Package Reference=691701310012B, Packaging=Box, Part Number=691701310012B, Pin Number=12, Pitch=3.81mm, Publisher=WurthElektronik
QA QB QC QD: "60V, 23A, Single N-Channel Power MOSFET", Package="SOP-8 Taiwan Semiconductor", Check_prices=https://www.snapeda.com/parts/TSM120N06LCS%20RLG/Taiwan+Semiconductor/view-part/?ref=eda, Digi-Key_Part_Number=TSM120N06LCSRLGTR-ND, MF="Taiwan Semiconductor", MP="TSM120N06LCS RLG", Purchase-URL="https://pricing.snapeda.com/search/part/TSM120N06LCS RLG/?ref=eda", SnapEDA_Link=https://www.snapeda.com/parts/TSM120N06LCS%20RLG/Taiwan+Semiconductor/view-part/?ref=snap
R1 R2 R3 R4 R5 R6 R8 R9 R10 R11 R12 R13 R14 R15 R16 R17 RSense: "Resistor", LatestRevisionDate=17-Jul-2002, LatestRevisionNote="Re-released for DXP Platform.", PackageDescription="Axial Device, Thru-Hole; 2 Leads; 0.3 in Pin Spacing", PackageReference=AXIAL-0.3, Published=8-Jun-2000, Publisher="Altium Limited"
R7: library part CMP-2001-04796-1, Manufacturer=Susumu, Part Number=RG2012N-101-W-T1
TB1: Supplier Part Number 1=ED2790-ND, Supplier 1=Digi-Key
U7 U8 U9 U10: "Optocoupler DC-IN 1-CH Transistor DC-OUT 4-Pin PDIP SMD Magazine", Case/Package=SMD/SMT, Collector Emitter Saturation Voltage=300mV, Current Transfer Ratio=300%, Forward Current=10mA, Isolation Voltage=5kV, Manufacturer=CEL, Manufacturer Part Number=PS2501L-1-L-A, Max Collector Current=50mA, Max Operating Temperature=100°C, Max Power Dissipation=150mW, Min Operating Temperature=-55°C, Output Voltage=80V, Package Quantity=100, Supplier Part Number 1=551-PS2501L-1-L-A, Category=Optocouplers, Collector Emitter Voltage (VCEO)=300mV, Collector-emitter Voltage-Max=300mV, ComponentLink1Description=https://datasheet.ciiva.com/2088/ps2501-2088124.pdf?src-supplier=Digi-Key, ComponentLink1URL=https://datasheet.ciiva.com/2088/ps2501-2088124.pdf?src-supplier=Digi-Key, Input Type=DC, Lead Free="Lead Free", Mount="Surface Mount", Number of Channels=1, Output Current per Channel=50mA, Packaging=Rail/Tube, RoHS=Yes, Series=NEPOC, Supplier 1=Mouser
Y1: library part CMP-0447-00001-4, "Crystal 32.768kHz ±20ppm (Tol) 12.5pF FUND 70kΩ 2-Pin CSMD T/R", Case/Package=CSMD, ESR (Equivalent Series Resistance)=70kR, Frequency=32.768kHz, Frequency Tolerance=20ppm, Load Capacitance=12.5pF, Max Operating Temperature=85°C, Min Operating Temperature=-40°C, Operating Frequency="32.768 kHz", Package Quantity=3000, Depth=1.5mm, Height=0.9mm, Lead Free="Lead Free", Length=3.2mm, Number of Pins=2, Packaging="Tape and Reel", Radiation Hardening=No, REACH SVHC="No SVHC", RoHS Compliant=Yes, Series=ABS07, Series Resistance=70kR, Termination=SMD/SMT, Tolerance=20ppm, Width=1.5mm

## Via types
v1: diameter 50, hole 28, Top Layer to Bottom Layer, 4 vias

## Nets (pads, with @x,y where several pads share a name; then routed paths per layer and width w, separated by ;. In a path a pad name is that pad's centre, name@x,y a point inside that pad or via, vN(x,y) a via of type N, cw(c..) or ccw(c..) an arc to the next point about the centre after c; other vN are vias at no path point)
3.3V: C37.2 R10.2 R14.2 R15.2 R16.2 U6.26 | length 4315.1
  Top Layer w10: R10.2 4237.5,4512.5 4237.5,4132.5 R14.2 4237.5,4127.5 4237.5,3742.5 R15.2 4242.25,3737.75 4242.25,3373.99 R16.2 ; U6.26 5599.51,5998.13 5574.89,5998.13 5520,6053.02 5520,6165 5615,6260 C37.2
  Bottom Layer w10: R10.2 4240,4751.74 4460,4971.74 5075,4971.74 5675,5571.74 5675,6220 C37.2
8-30V: C9.1 C11.2 C12.2 C13.2 C14.2 D1.1 D2.1 P1.11 QA.5 QA.6 QA.7 QA.8 R6.1 | length 2574.7
  Top Layer w10: P1.11@136.54,1275 815.24,1275 D2.1 ; C9.1 C11.2 C12.2 C13.2 C14.2 2470,680 R6.1 QA.5 QA.6 QA.7 QA.8
24V: C15.2 C16.2 C17.2 C18.2 C19.1 CR6.1 QD.5 QD.6 QD.7 QD.8 R17.2 TB1.3 TB1.7 TB1.11 TB1.15 | length 2452.6
  Top Layer w10: C19.1 C15.2 ; R17.2 1800,1265 1800,2162.5 C15.2 ; C18.2 C17.2 C16.2 C15.2 ; QD.8 CR6.1
A5V: C23.1 C25.2 C26.1 C28.2 C29.2 C31.1 C34.1 C36.2 FB1.4 U4.7 U5.2 U6.3 | length 6973
  Top Layer w10: C25.2 C23.1 1783.7,5550 2309.2,6075.5 2377.3,6075.5 2451.8,6150 U4.7 ; C28.2 C26.1 U5.2 ; C36.2 C34.1 C31.1 ; FB1.4 4712.01,5824.25 C29.2 4885.08,5997.32 5379.69,5997.32 U6.3
  Bottom Layer w10: C26.1 3430,6487.24 C34.1 ; C31.1 4340,6542.24 C29.2
AGND: C22.1 C23.2 C24.1 C25.1 C26.2 C28.1 C29.1 C30.2 C31.2 C32.2 C33.1 C34.2 C35.1 C36.1 C37.1 C38.1 FB1.3 TB1.4 TB1.8 TB1.12 TB1.16 U4.4 U4.5 U4.8 U5.4 U6.1 U6.2 U6.4 U6.5 U6.11 U6.12 U6.13 U6.14 U6.15 U6.16 U6.17 U6.18 U6.25 | length 13489.1
  Top Layer w10: C25.1 C23.2 1705,5250 C24.1 2342.75,5887.75 U4.4 U4.5 ; U4.8 2575.5,6200 2610,6234.5 C22.1 ; C28.1 C26.2 3630,5082.24 U5.4 3870,5082.24 4130,4822.24 C30.2 4885,5242.24 C29.1 4895.08,5697.24 4913.74,5715.91 U6.14 ; C36.1 C34.2 C31.2 C32.2 C33.1 5195,6140 5286.42,6048.58 U6.1 ; FB1.3 FB1.3@4644.06,5698.74 ; U6.11 U6.12 U6.13 U6.14 ; U6.5 U6.4 5380.49,5972.53 5407.53,5972.53 5440,6005 5440,6030 5421.42,6048.58 U6.1 ; U6.2 U6.1 ; U6.18 U6.17 U6.16 U6.15 U6.14 ; U6.25 5654.49,5971.81 5711.8,5914.51 5880.49,5914.51 6095,5700 C35.1 ; C37.1 5715,6554.29 5915,6354.29 C38.1
  Bottom Layer w10: C24.1 2320,5800 2450,5930 2450,6350 C22.1 ; C30.2 5271.02,4822.24 C35.1 ; FB1.3 4644.06,5698.74 4883.5,5698.74 C29.1 ; C33.1 5301.34,6348.58 C38.1
GND: C1.2 C2.1 C3.2 C4.1 C5.2 C6.1 C7.2 C8.1 C9.2 C11.1 C12.1 C13.1 C14.1 C15.1 C16.1 C17.1 C18.1 C19.2 C27.1 Cc1.1 Cc2.1 CF.1 CR1.2 CR2.2 Css.1 CVcc.1 FB1.2 J1.1 P1.12 R2.2 R4.1 RSense.2 U1.3 U1.5 U2.3 U2.5 U3.5 U3.7 U3.8 U3.10 U3.11 U3.19 U3.22 U3.33 U7.3 U8.3 U9.3 U10.3 | length 15619.6
  Top Layer w10: P1.12 166.54,849.41 255.08,760.87 J1.1@305.08,760.87 ; C19.2 C15.1 ; C9.2 C11.1 C12.1 C13.1 C14.1 ; Cc1.1@1847.26,1540 Cc1.1 1840,1772.5 C16.1 C17.1 C18.1 ; Cc2.1@2067.74,1319.53 Cc2.1 ; U3.7 U3.8 2528.45,1380.56 2569,1340 ; U3.5 2528.35,1480.06 2507.49,1480.06 2470,1442.57 2470,1395 2525,1340 2569,1340 ; R2.2 2595.47,1050.47 2595.47,1340 ; U3.10 U3.11 ; Css.1 2442.58,1925 2425.08,1907.5 C18.1 ; R4.1 2580,2582.5 2496.75,2499.25 2496.75,1989.25 C18.1 ; U3.33 2595.47,1460.47 U3.11 ; U3.19 2774.3,1460.47 2790.39,1444.38 2928.12,1444.38 v1(2970,1402.5) ; U3.22 2795.85,1519.53 2814,1501.38 2891.38,1501.38 CF.1 ; C27.1 2975,5531.02 3137.44,5693.46 FB1.2 ; C5.2 C6.1 5602.5,467.5 CR2.2 ; C1.2 C2.1 5705,1930 5612.5,1837.5 CR1.2 ; v1(6050,757.5) U2.3 6050,952 6084,986 6150,986 6184,952 U2.5 ; U1.5 6317,2333.5 6640,2010.5 C4.1 C3.2 ; 2569,1340 2595.47,1340 ; 2595.47,1340 U3.11
  Bottom Layer w10: C15.1 C16.1 ; Cc1.1 1847.26,1540 2067.74,1319.53 Cc2.1 2226.97,1167.56 2283.51,1167.56 2466.07,985 R2.2 ; C14.1 2530,400 R2.2 ; Css.1 2725.93,1925 2763.43,1962.5 CVcc.1 ; R4.1 3617.79,3027.5 3637.79,3007.5 RSense.2 ; v1(2970,1402.5) 2970,1500 CF.1 2886.27,1540 2847.65,1578.62 2814,1578.62 2791.38,1556 2791.38,1246.38 R2.2 ; C5.2 C6.1 6232.5,575 ; C2.1 5864.06,2169.06 6018.06,2169.06 U1.3 U1.5 ; v1(6050,757.5) 6232.5,575 ; C7.2 C8.1 6232.5,575
NetC1_1: C1.1 C2.2 U1.2 | length 903.8
  Top Layer w10: C1.1 C2.2 5916,2310 U1.2
NetC3_1: C3.1 C4.2 L1.2 U1.4 | length 1378.6
  Top Layer w10: L1.2 6156.34,2045 6161.18,2049.84 6161.18,2051.81 6250,2140.63 U1.4 6450,2310 C4.2 C3.1
NetC5_1: C5.1 C6.2 U2.2 | length 786.1
  Top Layer w10: C5.1 C6.2 5821,986 5949,986 5983,952 U2.2
NetC7_1: C7.1 C8.2 L2.2 U2.4 | length 1199.6
  Top Layer w10: U2.4 6117,886 6195.5,807.5 ; L2.2 6176,788 6195.5,807.5 ; C7.1 C8.2 6386.38,875 6318.88,807.5 6195.5,807.5
NetC10_1: C10.1 R5.2 U3.1 | length 2528.2
  Top Layer w10: C10.1 2475.31,1558.9 U3.1
  Bottom Layer w10: R5.2 1956.87,2947.5 1630,2620.63 1630,1682.5 1673.29,1639.21 C10.1
NetC10_2: C10.2 R4.2 U3.2 | length 2770.2
  Top Layer w10: C10.2 U3.2
  Bottom Layer w10: R4.2 2010,3027.5 1610,2627.5 1610,1662.5 1668.08,1604.42 2329.79,1604.42 C10.2
NetC20_1: C20.1 C21.2 D3.2 F1.2 R7.2 U4.2 | length 1381.8
  Top Layer w10: F1.2 R7.2 D3.2 C20.1 C21.2 2244.5,6230 2324.5,6150 U4.2
NetC20_2: C20.2 C21.1 D3.1 R7.1 U4.3 | length 1420.6
  Top Layer w10: R7.1 1088.94,6153.23 1169.17,6073 D3.1 1277,6073 1420,5930 C20.2 C21.1 2255,6100 U4.3
NetC22_2: C22.2 U4.1 | length 334.3
  Top Layer w10: C22.2 2310,6214.5 2324.5,6200 U4.1
NetC24_2: C24.2 R8.2 | length 140
  Top Layer w10: C24.2 R8.2
NetC27_2: C27.2 FB1.1 | length 162.4
  Top Layer w10: C27.2 FB1.1
NetC30_1: C30.1 C32.1 C33.2 U5.6 U6.6 | length 3538.6
  Top Layer w10: U5.6 4455,5132.24 C30.1 ; C32.1 C33.2 5292.76,6542.24 5490,6345 5490,6006.24 5405.11,5921.35 5380.49,5921.35 U6.6
  Bottom Layer w10: C30.1 4667.24,5122.24 5015,5470 5015,6362.24 C33.2
NetC35_2: C35.2 U6.27 Y1.2 | length 526.6
  Top Layer w10: U6.27 5666.42,6022.99 5739.25,5950.16 Y1.2 5758.94,5946.22 C35.2
NetC38_2: C38.2 U6.28 Y1.1 | length 314.8
  Top Layer w10: U6.28 Y1.1 C38.2
NetCA_1: CA.1 CR6.2 L3.2 QC.5 QC.6 QC.7 QC.8 QD.1 QD.2 QD.3 U3.24 | length 5647
  Top Layer w10: CA.1 2610,2277.5 QD.1 QD.2 QD.3 2746.26,2177.5 2906.56,2017.2 2994.7,2017.2 QC.6@3155,1856.91 ; U3.24 2755,1592.35 2755,1772.5 2816.57,1834.07 QC.8 QC.7 QC.6 ; QC.5 QC.6 ; L3.2 4199.71,1035.29 4821.94,1035.29 4827.79,1041.15 4827.79,2099.71 4713.02,2214.48 3241.98,2214.48 3155,2127.5 QC.6@3155,1856.91 ; QC.6 QC.6@3155,1856.91
NetCA_2: CA.2 CR4.1 U3.27 | length 1553.3
  Top Layer w10: U3.27 2654.53,1967.97 2575,2047.5 CA.2 2536.38,2181.12 2536.38,2258.5 2617.88,2340 CR4.1
NetCB_1: CB.1 CR3.1 U3.14 | length 974
  Top Layer w10: CB.1 U3.14 ; v1(2780,1922.5) 2912.5,1922.5 CR3.1
  Bottom Layer w10: CB.1 2772.38,1382.85 2772.38,1639.63 2780,1647.25 v1(2780,1922.5)
NetCB_2: CB.2 CR5.1 L3.1 QA.1 QA.2 QA.3 QB.5 QB.6 QB.7 QB.8 U3.17 | length 2009.7
  Top Layer w10: CB.2 2821.26,1165 2925,1268.74 QA.1 ; U3.17 2751.4,1421.1 2825,1347.5 QA.3 ; QA.3@2825,1268.74 QA.3 ; L3.1 3615,1712.5 3382.5,1480 CR5.1 3347.5,1480 3329,1461.5 3329,1412.09 3309.41,1392.5 QB.8 QB.7 QB.6 QB.5 3157.73,1242.5 3131.92,1216.69 3032.72,1216.69 2957.84,1291.57 QA.1 ; QA.3 QA.2 QA.1
NetCc1_2: Cc1.2 R1.1 | length 491.3
  Top Layer w10: Cc1.2 2060.47,1219.53 R1.1
NetCc2_2: Cc2.2 R1.2 U3.3 | length 469.1
  Top Layer w10: Cc2.2 R1.2 2252.21,1519.53 2271.15,1500.59 2411,1500.59 2429.93,1519.53 U3.3
NetCF_2: CF.2 R6.2 U3.23 | length 986.6
  Top Layer w10: U3.23 2772.15,1539.21 2772.94,1540 CF.2
  Bottom Layer w10: R6.2 2830,740 CF.2
NetCR1_1: CR1.1 L1.1 U1.1 | length 737.3
  Top Layer w10: CR1.1 5797.5,1837.5 5816,1856 5867.59,1856 6056.59,2045 L1.1 6115,2268 U1.1
NetCR2_1: CR2.1 L2.1 U2.1 | length 653.4
  Top Layer w10: CR2.1 5919,402.5 L2.1 5924,911 U2.1
NetCR3_2: CR3.2 CR4.2 CVcc.2 U3.21 | length 1305
  Top Layer w10: U3.21 2788.67,1499.84 2806.13,1482.38 2927,1482.38 2968.62,1524 2968.62,1595.94 2915,1649.56 CR3.2 3212.5,1740 CVcc.2 3296.38,1901.12 3296.38,2022.19 3335,2060.81 CR4.2
NetCR5_2: CR5.2 QB.1 QB.2 QB.3 QC.1 QC.2 QC.3 R5.1 RSense.1 | length 3544.6
  Top Layer w10: QC.1 QC.2 QC.3 3155,1653.76 3180.81,1679.57 3350.43,1679.57 CR5.2 ; QB.3 QB.2 QB.1 3106.26,1392.5 3329,1615.24 3329,1646.5 3347.5,1665 CR5.2 ; v1(3535,1847.5) 3527.35,1839.85 3527.35,1809.85 3382.5,1665 CR5.2
  Bottom Layer w10: R5.1 2585,2947.5 2645,3007.5 3601.58,3007.5 3607.44,3001.64 3607.44,2750.06 RSense.1 3650,1962.5 v1(3535,1847.5)
NetCss_2: Css.2 U3.31 | length 238.4
  Top Layer w10: U3.31 Css.2
NetD1_2: D1.2
NetD2_2: D2.2
NetF1_1: F1.1
NetJ1_2: J1.2
NetP1_1: P1.1
NetP1_2: P1.2
NetP1_3: P1.3
NetP1_4: P1.4
NetP1_5: P1.5
NetP1_6: P1.6
NetP1_7: P1.7
NetP1_8: P1.8
NetQA_4: QA.4 U3.15 | length 166.9
  Top Layer w10: U3.15 2674.31,1393.35 2674.31,1372.49 2728.53,1318.27 2768.19,1318.27 2775,1311.46 QA.4
NetQB_4: QB.4 U3.18 | length 444
  Top Layer w10: U3.18 2767.11,1440.79 2782.52,1425.38 2855.72,1425.38 2987.33,1293.77 3038.6,1242.5 QB.4
NetQC_4: QC.4 U3.20 | length 573.2
  Top Layer w10: U3.20 2781.48,1480.16 2798.26,1463.38 3060.29,1463.38 3205,1608.09 QC.4
NetQD_4: QD.4 U3.26 | length 561.3
  Top Layer w10: U3.26 2674.21,1834.39 2723.43,1883.6 QD.4
NetR2_1: R2.1 R3.1 U3.4 | length 360.4
  Top Layer w10: U3.4 2469.84,1499.84 R3.1 2395,1422.5 2530,1287.5 R2.1
NetR3_2: R3.2 R17.1 | length 155
  Top Layer w10: R17.1 R3.2
NetR8_1: R8.1 U4.6 | length 137.8
  Top Layer w10: U4.6 R8.1
NetR9_1: R9.1 U7.1 | length 155.5
  Top Layer w10: R9.1 U7.1
NetR9_2: R9.2
NetR10_1: R10.1 U7.4 | length 165.5
  Top Layer w10: U7.4 R10.1
NetR11_1: R11.1 U8.1 | length 155
  Top Layer w10: R11.1 U8.1
NetR11_2: R11.2
NetR12_1: R12.1 U9.1 | length 160
  Top Layer w10: R12.1 U9.1
NetR12_2: R12.2
NetR13_1: R13.1 U10.1 | length 155.5
  Top Layer w10: R13.1 U10.1
NetR13_2: R13.2
NetR14_1: R14.1 U8.4 | length 161
  Top Layer w10: U8.4 R14.1
NetR15_1: R15.1 U9.4 | length 161
  Top Layer w10: U9.4 R15.1
NetR16_1: R16.1 U10.4 | length 165.5
  Top Layer w10: U10.4 R16.1
NetTB1_1: TB1.1
NetTB1_2: TB1.2
NetTB1_5: TB1.5
NetTB1_6: TB1.6
NetTB1_9: TB1.9
NetTB1_10: TB1.10
NetTB1_13: TB1.13
NetTB1_14: TB1.14
NetU6_7: U6.7
NetU6_8: U6.8
NetU6_9: U6.9
NetU6_10: U6.10
NetU6_19: U6.19
NetU6_20: U6.20
NetU6_21: U6.21
NetU6_22: U6.22
NetU6_23: U6.23
NetU6_24: U6.24
NetU7_2: U7.2
NetU8_2: U8.2
NetU9_2: U9.2
NetU10_2: U10.2
pads on no net: J1.3 L3.3 P1.9 P1.10 U2.6 U3.6 U3.9 U3.12 U3.13 U3.16 U3.25 U3.28 U3.29 U3.30 U3.32 U5.1 U5.3 U5.5 U5.7 U5.8

## Text inside footprints (layer, text, board x,y; h text height)
C1: Top Overlay "+" at 5324.01,2480.15 h59.06 r90
C3: Top Overlay "+" at 7069.01,2480.15 h59.06 r90
C5: Top Overlay "+" at 5319.01,1045.15 h59.06 r90
C7: Top Overlay "+" at 6844.01,1045.15 h59.06 r90
C9: Top Overlay "+" at 1384.01,810.15 h59.06 r90
C19: Top Overlay "+" at 1379.01,2377.65 h59.06 r90
C20: Top Overlay "+" at 1719.01,6400.15 h59.06 r90
C23: Top Overlay "+" at 1361.76,5720.15 h59.06 r90
C26: Top Overlay "+" at 3459.01,5352.4 h59.06 r90
C30: Top Overlay "+" at 4494.01,5292.4 h59.06 r90
C31: Top Overlay "+" at 4159.01,6712.4 h59.06 r90
C32: Top Overlay "+" at 4789.01,6712.4 h59.06 r90
C34: Top Overlay "+" at 3514.01,6712.4 h59.06 r90
L3: Top Overlay "*" at 3907.5,1955 h50 r270; Mechanical 13 "*" at 3907.5,1847.5 h50 r270
U2: Top Overlay "*" at 5845,894 h50; Mechanical 13 "*" at 5845,894 h50
U3: Top Overlay "*" at 2490,1575 h50; Mechanical 13 "*" at 2531.79,1543.74 h50
U4: Top Overlay "*" at 2320.25,6216 h50; Mechanical 13 "*" at 2374,6170.5 h50
U5: Top Overlay "*" at 3830,5249.24 h50; Mechanical 13 "*" at 3883.5,5202.74 h50
U7: Top Overlay "*" at 3403,4567 h50; Mechanical 13 "*" at 3464.5,4509.5 h50
U8: Top Overlay "*" at 3402.5,4182 h50; Mechanical 13 "*" at 3464,4124.5 h50
U9: Top Overlay "*" at 3407.5,3792 h50; Mechanical 13 "*" at 3469,3734.5 h50
U10: Top Overlay "*" at 3407.5,3423.74 h50; Mechanical 13 "*" at 3469,3366.24 h50